# EAGLE board controlBoard (EAGLE 9.2.0)
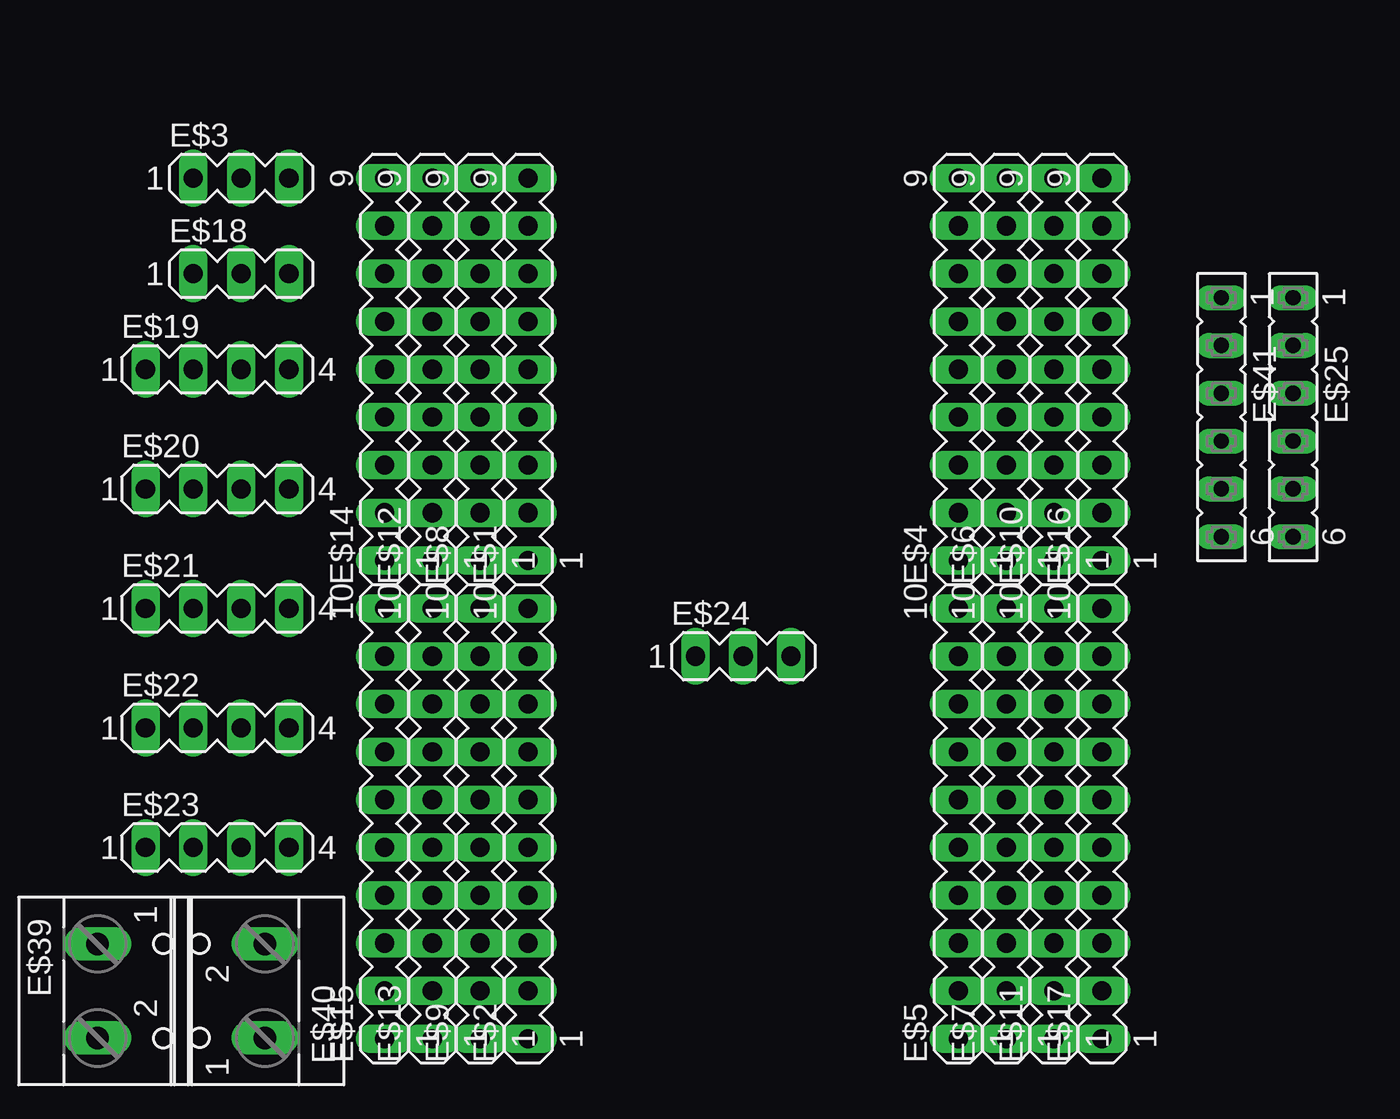
[diagram p0: board, top side]
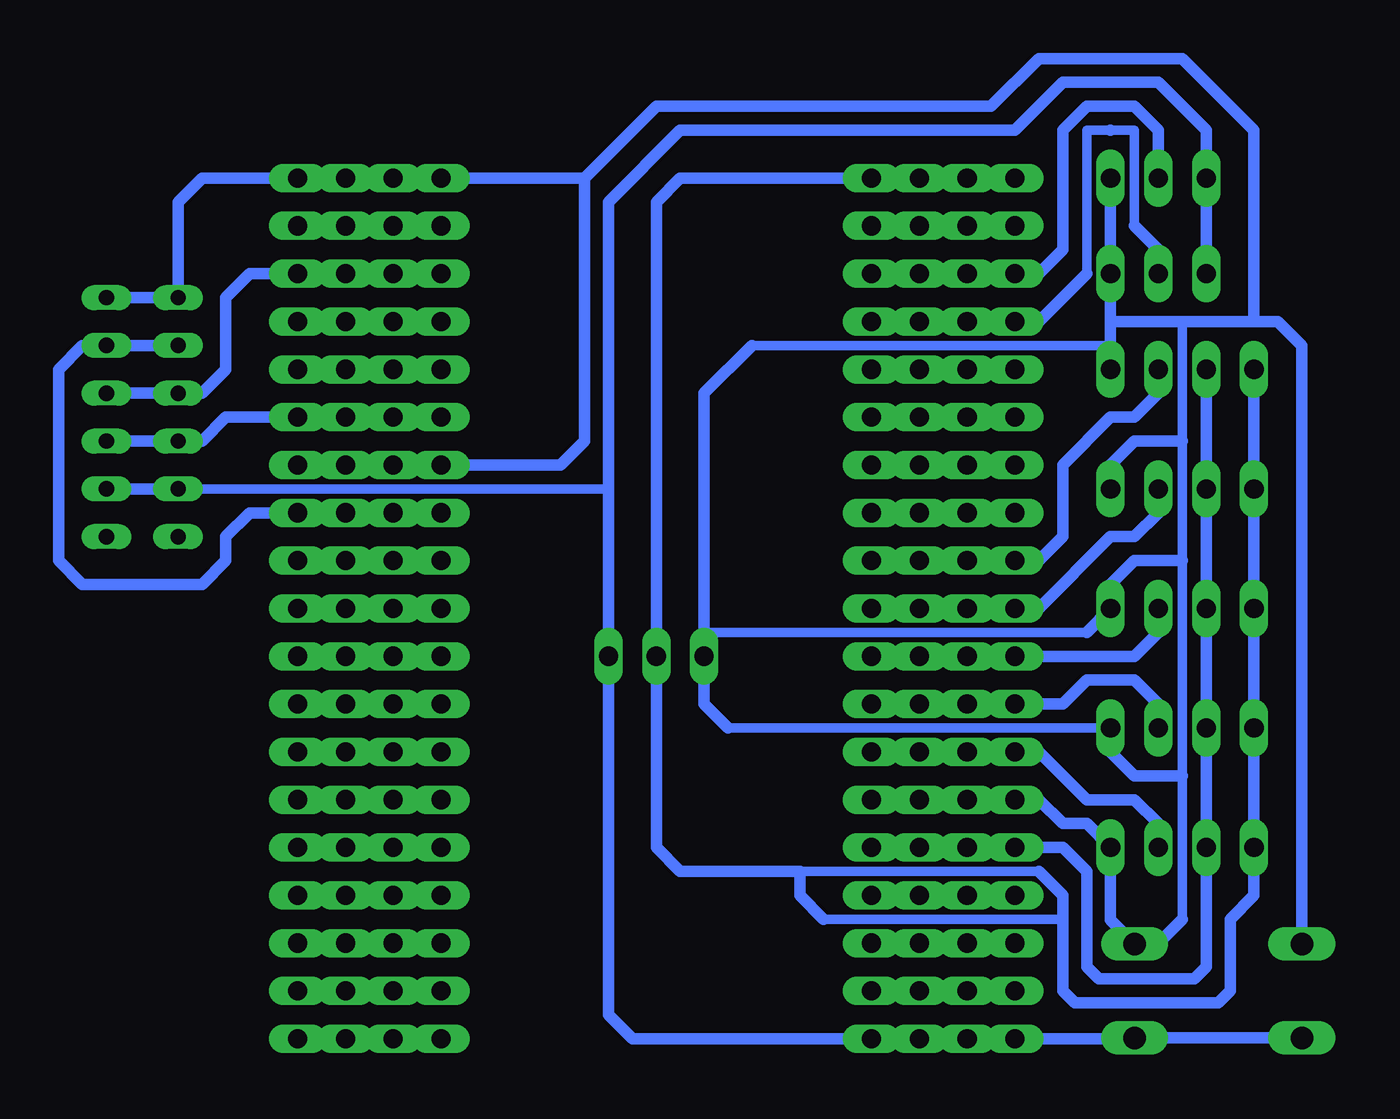
[diagram p1: board, bottom side, seen from below]

No outline drawn. Coordinates in mm, seen from the top.
Copper layers (1*16): Top 0.035mm / dielectric 1.5mm / Bottom 0.035mm
Design rules "default": minimum track width 6mil, minimum drill 0.35mm, track to track 6mil, track to pad 6mil, pad to pad 6mil, via to via 6mil, smd to smd 6mil, copper to edge 40mil, drill to drill 6mil, minimum pad ring 10mil, minimum via ring 8mil, stop-mask expansion 4mil, vias tented up to drill 0mil, thermal gap 10mil

## Footprints (pad centres in the part's own frame; a part is rotated, then mirrored left to right if it is on the bottom)
MA09-1 = drill 1.016 long: 1 -10.16,0; 2 -7.62,0; 3 -5.08,0; 4 -2.54,0; 5 0,0; 6 2.54,0; 7 5.08,0; 8 7.62,0; 9 10.16,0
MA10-1 = drill 1.016 long: 1 -11.43,0; 2 -8.89,0; 3 -6.35,0; 4 -3.81,0; 5 -1.27,0; 6 1.27,0; 7 3.81,0; 8 6.35,0; 9 8.89,0; 10 11.43,0
MA03-1 = drill 1.016 long: 1 -2.54,0; 2 0,0; 3 2.54,0
MA04-1 = drill 1.016 long: 1 -3.81,0; 2 -1.27,0; 3 1.27,0; 4 3.81,0
FE06 = drill 0.813 long: 1 -6.35,0; 2 -3.81,0; 3 -1.27,0; 4 1.27,0; 5 3.81,0; 6 6.35,0
W237-102 = drill 1.194 long: 1 -2.5,-1.27; 2 2.5,-1.27

## Placement (x,y rotation side)
E$1  [MA09-1]  33.02,66.04 90 top
E$2  [MA10-1]  33.02,41.91 90 top
E$3  [MA03-1]  17.78,76.2 0 top
E$4  [MA09-1]  55.88,66.04 90 top
E$5  [MA10-1]  55.88,41.91 90 top
E$6  [MA09-1]  58.42,66.04 90 top
E$7  [MA10-1]  58.42,41.91 90 top
E$8  [MA09-1]  30.48,66.04 90 top
E$9  [MA10-1]  30.48,41.91 90 top
E$10  [MA09-1]  60.96,66.04 90 top
E$11  [MA10-1]  60.96,41.91 90 top
E$12  [MA09-1]  27.94,66.04 90 top
E$13  [MA10-1]  27.94,41.91 90 top
E$14  [MA09-1]  25.4,66.04 90 top
E$15  [MA10-1]  25.4,41.91 90 top
E$16  [MA09-1]  63.5,66.04 90 top
E$17  [MA10-1]  63.5,41.91 90 top
E$18  [MA03-1]  17.78,71.12 0 top
E$19  [MA04-1]  16.51,66.04 0 top
E$20  [MA04-1]  16.51,59.69 0 top
E$21  [MA04-1]  16.51,53.34 0 top
E$22  [MA04-1]  16.51,46.99 0 top
E$23  [MA04-1]  16.51,40.64 0 top
E$24  [MA03-1]  44.45,50.8 0 top
E$25  [FE06]  73.66,63.5 270 top
E$39  [W237-102]  11.43,33.02 270 top
E$40  [W237-102]  17.78,33.02 90 top
E$41  [FE06]  69.85,63.5 270 top

## Library data of the parts
E$1-E$24 = con-lstb
E$25 E$41 = con-lsta
E$39 E$40 = con-wago-500

## Nets
S$1: E$2.6 E$3.3 E$4.3 E$4.9 E$9.6 E$13.6 E$15.6 E$18.3 E$19.4 E$20.4 E$21.4 E$22.4 E$23.4 E$24.1 E$39.1 E$40.2
S$2: E$2.7 E$9.7 E$13.7 E$15.7 E$23.3
S$3: E$2.8 E$9.8 E$13.8 E$15.8 E$22.3
S$4: E$2.9 E$9.9 E$13.9 E$15.9 E$21.3
S$5: E$2.10 E$9.10 E$13.10 E$15.10 E$20.3
S$6: E$1.1 E$8.1 E$12.1 E$14.1 E$19.3
S$7: E$1.7 E$3.2 E$8.7 E$12.7 E$14.7
S$8: E$1.6 E$8.6 E$12.6 E$14.6 E$18.2
S$9: E$2.1 E$3.1 E$9.1 E$13.1 E$15.1 E$18.1 E$24.3 E$25.5 E$39.2 E$40.1 E$41.5
S$10: E$2.5 E$9.5 E$13.5 E$15.5 E$19.2 E$20.2 E$21.2 E$22.2 E$23.2
S$11: E$1.9 E$8.9 E$12.9 E$14.9 E$19.1 E$20.1 E$21.1 E$22.1 E$23.1 E$24.2
S$12: E$16.9 E$25.1 E$41.1
S$13: E$16.2 E$25.2 E$41.2
S$14: E$16.7 E$25.3 E$41.3
S$15: E$16.4 E$25.4 E$41.4

## Tracks (layer width: path | path; a pad name or v marks a point on that pad's centre or on a via)
S$1
  Bottom 0.508: 16.51,36.83 16.51,44.45 16.51,55.88 16.51,62.23 16.51,68.58 | 20.32,67.31 39.37,67.31 | 21.59,52.07 41.91,52.07 | E$22.4 40.64,46.99
  Bottom 0.61: 16.51,36.83 17.78,35.56 19.01,35.56 E$40.2 20.32,36.79 E$23.4 21.59,41.91 22.86,41.91 24.13,43.18 E$15.6 E$13.6 E$9.6 E$2.6 | 20.32,68.58 16.51,68.58 12.7,68.58 | 20.32,68.58 20.32,67.31 E$19.4 | E$3.3 E$18.3 20.32,68.58 | E$20.4 20.32,60.96 19.05,62.23 16.51,62.23 | 16.51,55.88 19.05,55.88 20.32,54.61 E$21.4 21.59,52.07 | E$22.4 20.32,45.72 19.05,44.45 16.51,44.45 | E$39.1 10.16,67.31 11.43,68.58 12.7,68.58 | 39.37,67.31 41.91,64.77 41.91,52.07 E$24.1 41.91,48.26 40.64,46.99 | 12.7,68.58 12.7,78.74 16.51,82.55 24.13,82.55 26.67,80.01 44.45,80.01 48.26,76.2 | 48.26,76.2 E$4.9 | 48.26,76.2 48.26,62.23 49.53,60.96 E$4.3
S$2
  Bottom 0.61: E$23.3 17.78,41.91 19.05,43.18 21.59,43.18 24.13,45.72 E$15.7 E$13.7 E$9.7 E$2.7
S$3
  Bottom 0.61: E$22.3 17.78,48.26 19.05,49.53 21.59,49.53 22.86,48.26 E$15.8 E$13.8 E$9.8 E$2.8
S$4
  Bottom 0.61: E$21.3 17.78,52.07 19.05,50.8 E$15.9 E$13.9 E$9.9 E$2.9
S$5
  Bottom 0.61: E$20.3 17.78,58.42 19.05,57.15 20.32,57.15 24.13,53.34 E$15.10 E$13.10 E$9.10 E$2.10
S$6
  Bottom 0.61: E$19.3 17.78,64.77 19.05,63.5 20.32,63.5 22.86,60.96 22.86,57.15 24.13,55.88 E$14.1 E$12.1 E$8.1 E$1.1
S$7
  Bottom 0.61: E$3.2 17.78,78.74 19.05,80.01 21.59,80.01 22.86,78.74 22.86,72.39 24.13,71.12 E$14.7 E$12.7 E$8.7 E$1.7
S$8
  Bottom 0.508: 19.05,73.66 19.05,78.74 20.32,78.74 21.59,78.74 21.59,71.12
  Bottom 0.61: E$18.2 17.78,72.39 19.05,73.66 | E$1.6 E$8.6 E$12.6 E$14.6 24.13,68.58 21.59,71.12 | 20.32,78.74
S$9
  Bottom 0.508: E$41.5 46.99,59.69
  Bottom 0.61: E$39.2 E$40.1 19.09,30.48 E$15.1 E$13.1 E$9.1 E$2.1 45.72,30.48 46.99,31.75 E$24.3 46.99,59.69 46.99,74.93 43.18,78.74 25.4,78.74 22.86,81.28 17.78,81.28 15.24,78.74 E$3.1 E$18.1 | E$41.5 E$25.5
S$10
  Bottom 0.61: E$19.2 E$20.2 E$21.2 | 15.24,52.07 E$21.2 | E$21.2 E$22.2 E$23.2 15.24,34.29 15.88,33.66 20.95,33.66 21.59,34.29 21.59,39.37 22.86,40.64 E$15.5 E$13.5 E$9.5 E$2.5
S$11
  Bottom 0.508: 24.13,39.37 36.83,39.37 | 22.86,36.83 35.56,36.83
  Bottom 0.61: E$19.1 E$20.1 E$21.1 E$22.1 E$23.1 12.7,38.1 13.97,36.83 13.97,33.02 14.61,32.38 22.23,32.38 22.86,33.02 22.86,36.83 22.86,38.1 24.13,39.37 | E$14.9 E$12.9 E$8.9 E$1.9 43.18,76.2 44.45,74.93 E$24.2 44.45,40.64 43.18,39.37 36.83,39.37 36.83,38.1 35.56,36.83
S$12
  Bottom 0.61: E$25.1 E$41.1 69.85,74.93 68.58,76.2 E$16.9
S$13
  Bottom 0.61: E$16.2 66.04,58.42 67.31,57.15 67.31,55.88 68.58,54.61 74.93,54.61 76.2,55.88 76.2,66.04 74.93,67.31 E$25.2 E$41.2
S$14
  Bottom 0.61: E$16.7 66.04,71.12 67.31,69.85 67.31,66.04 68.58,64.77 E$41.3 E$25.3
S$15
  Bottom 0.61: E$16.4 67.31,63.5 68.58,62.23 E$41.4 E$25.4